# Altium PCB PCB1.PcbDoc
Units mil, origin at the board's own origin, x right, y up, seen from the top; angles counter-clockwise.
Board outline 1760 x 1045 mil, 4 copper layers (Top Copper, Signal Layer 1, Signal Layer 2, Bottom Copper), stack 38.189 mil thick; 34 components, 38 nets, 181 pads, 78 vias.
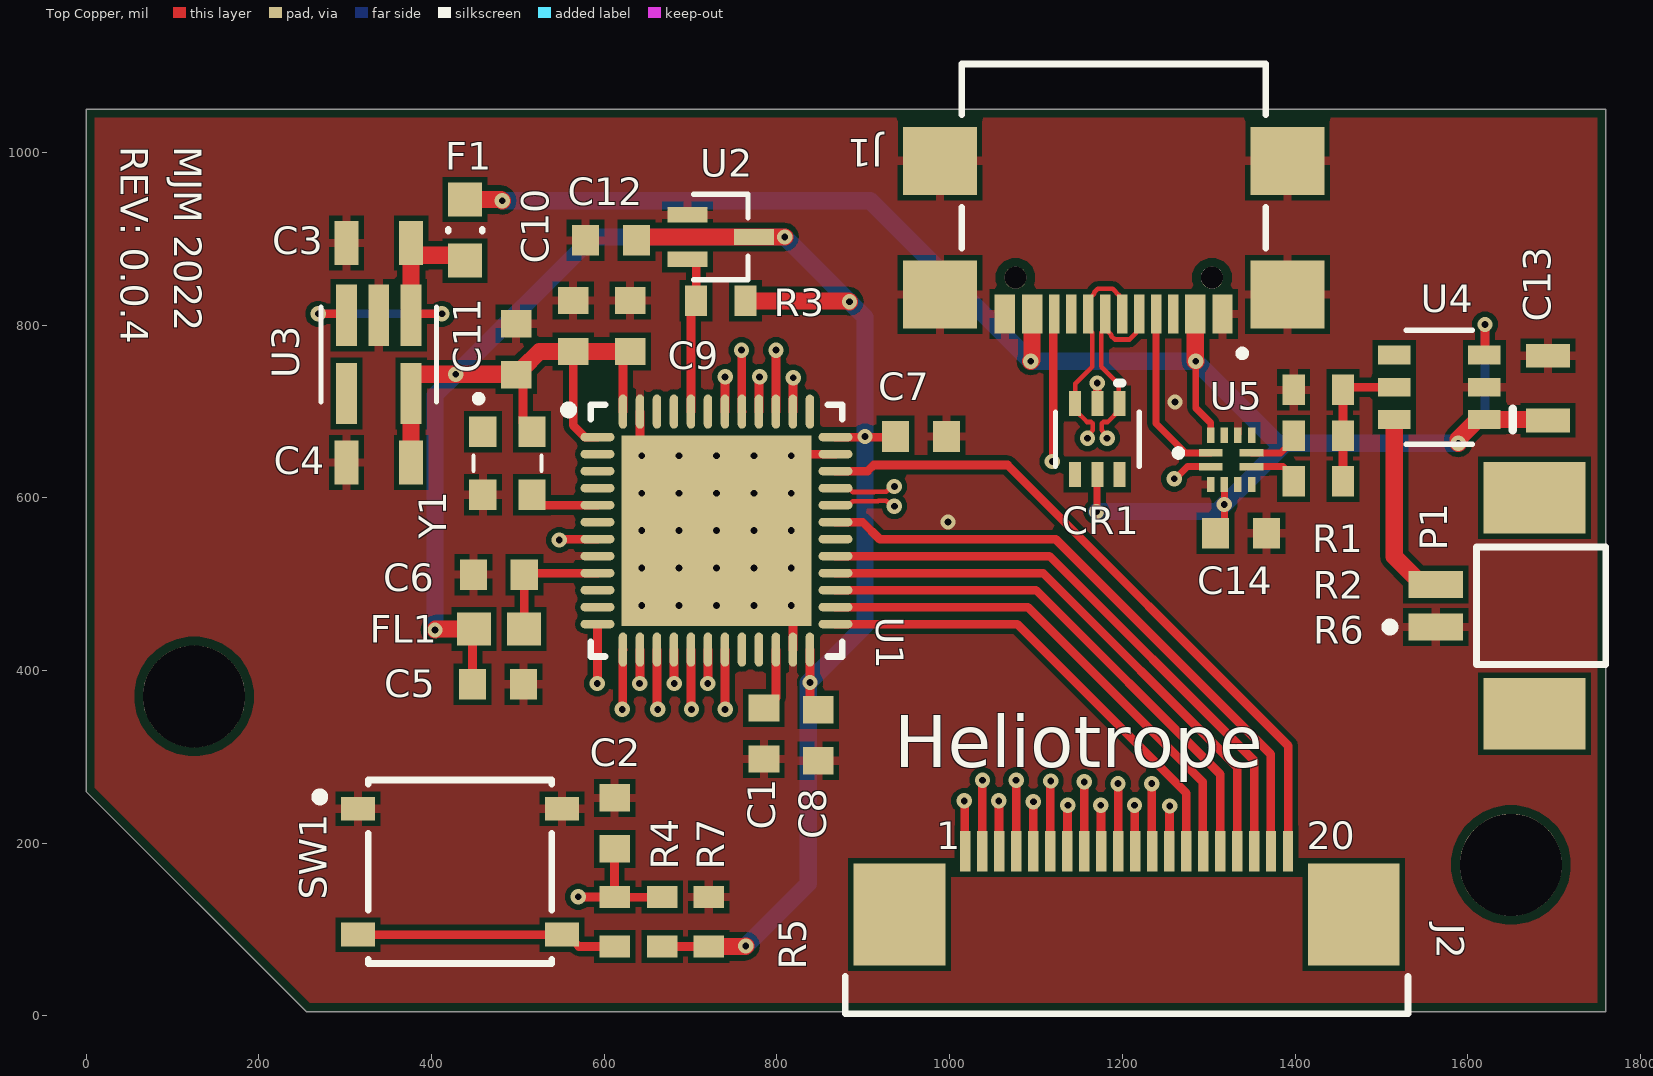
[diagram p0: Top Copper view]
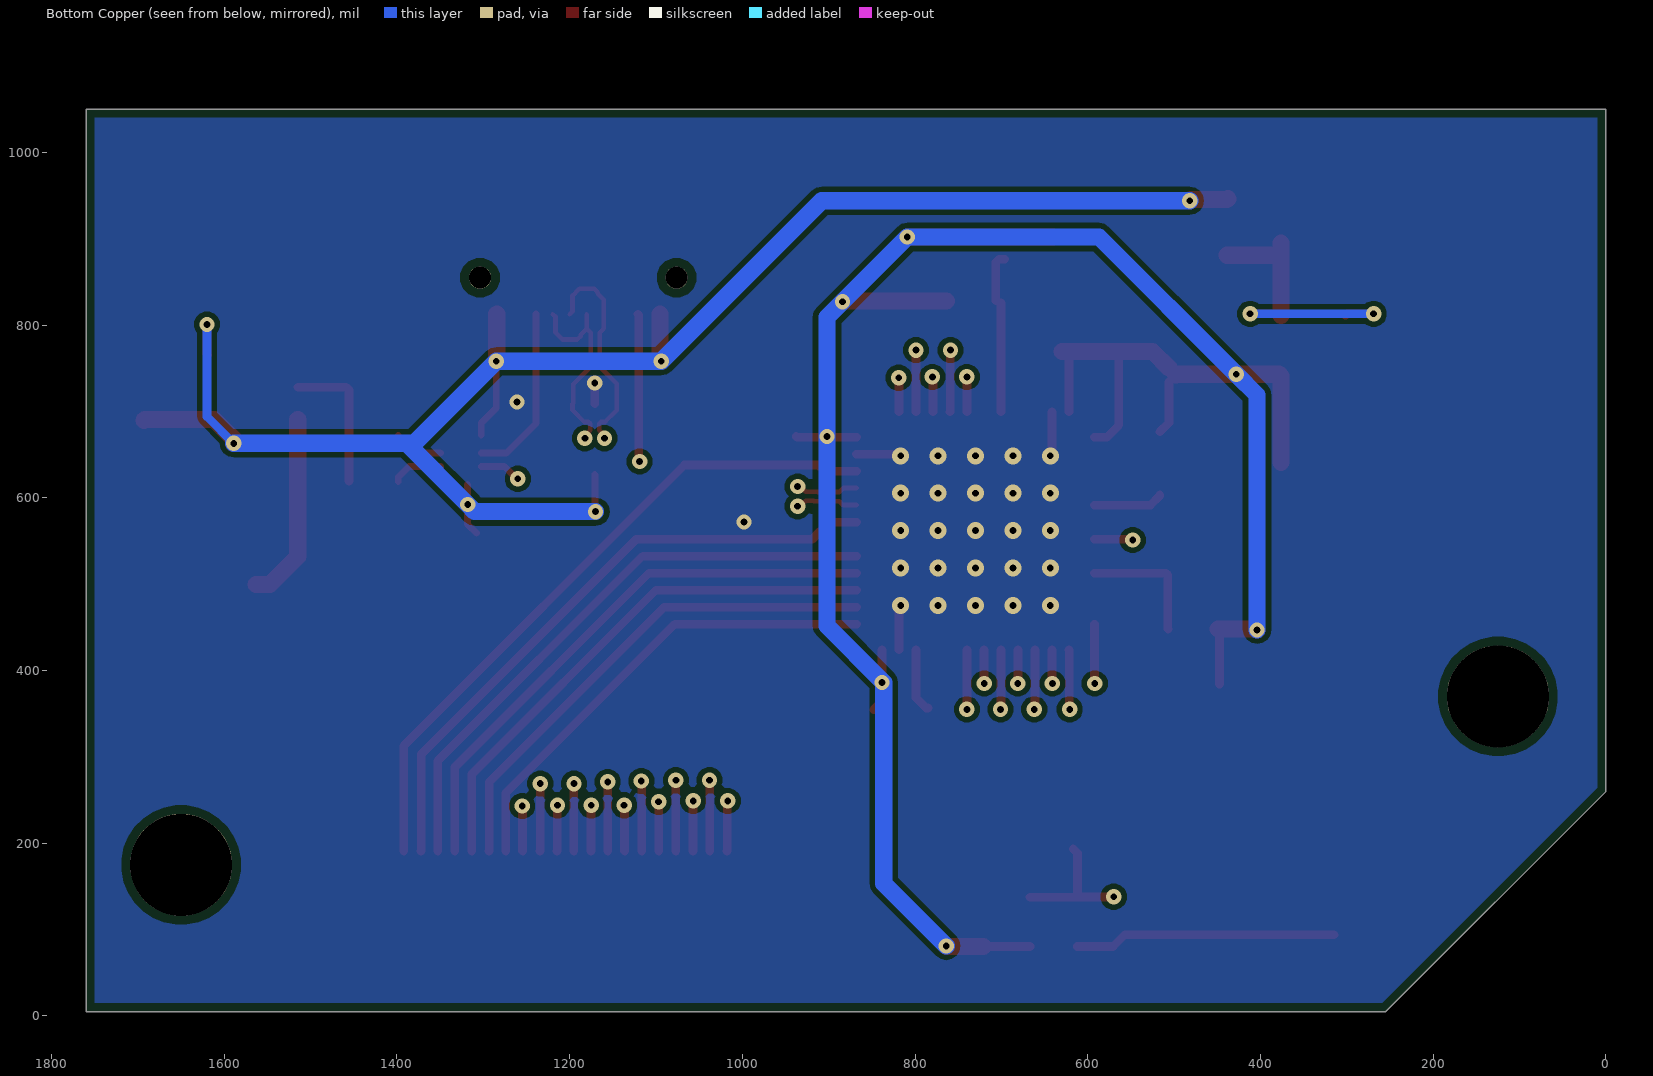
[diagram p1: Bottom Copper view, seen from below]
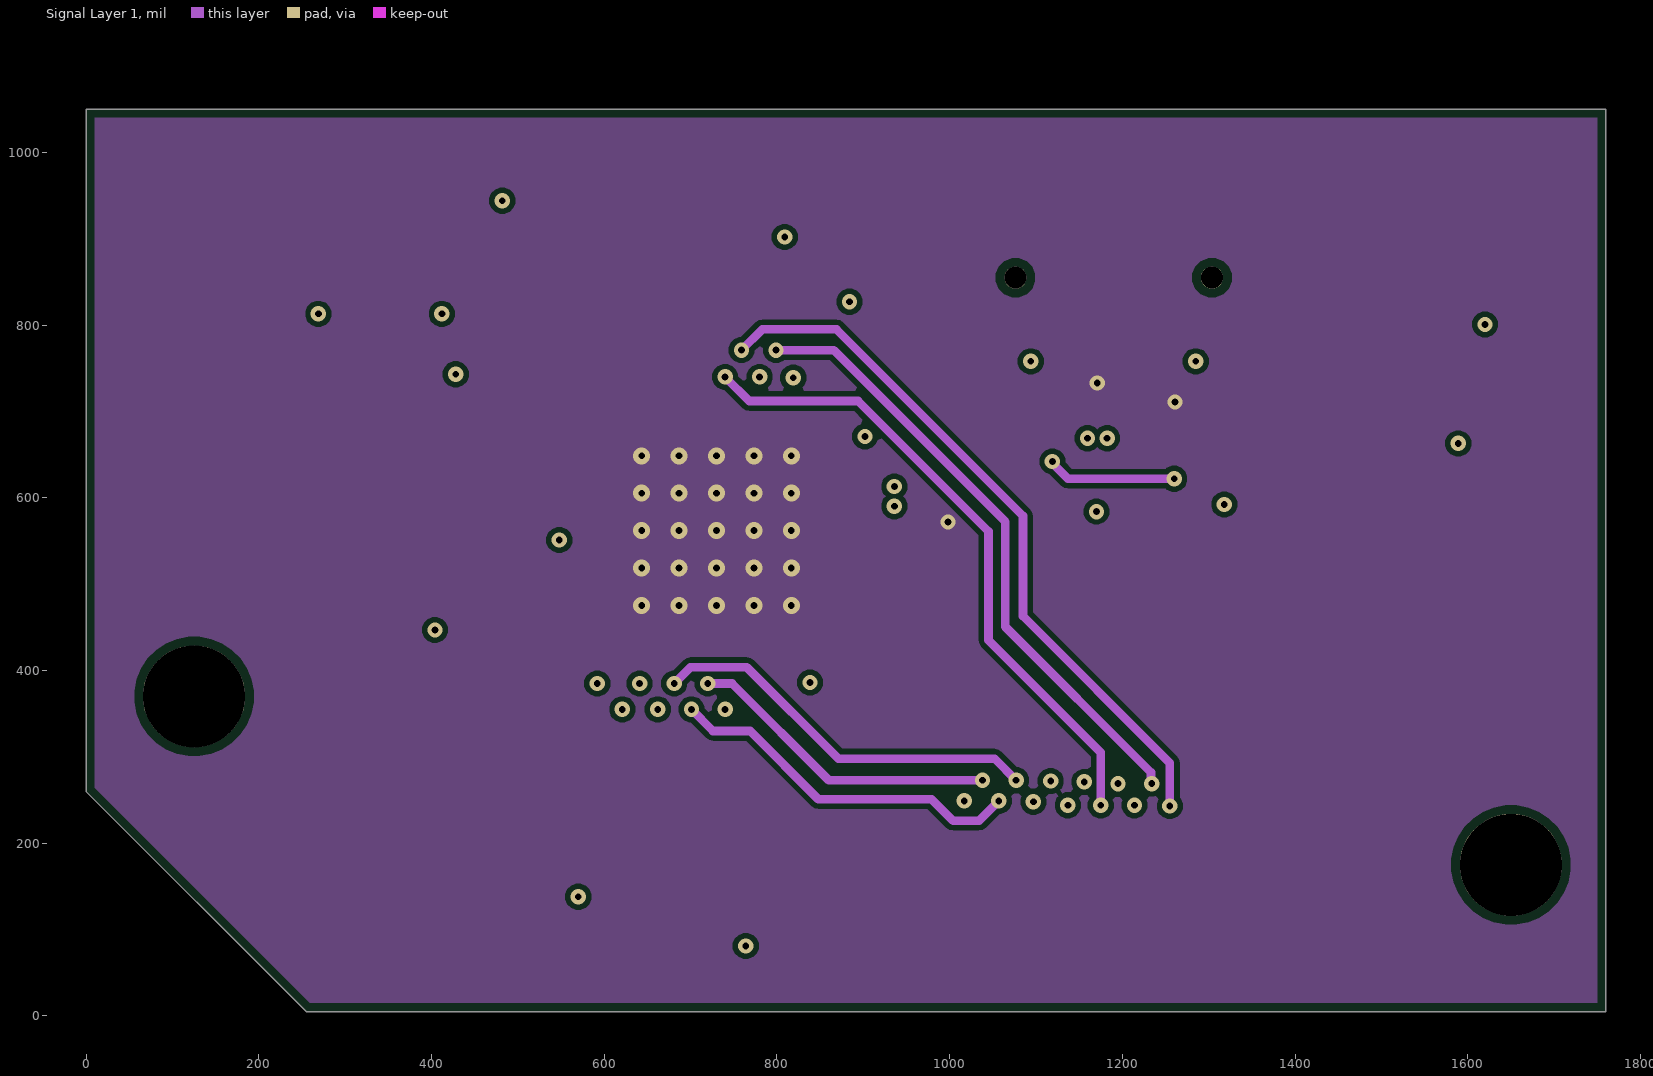
[diagram p2: Signal Layer 1]
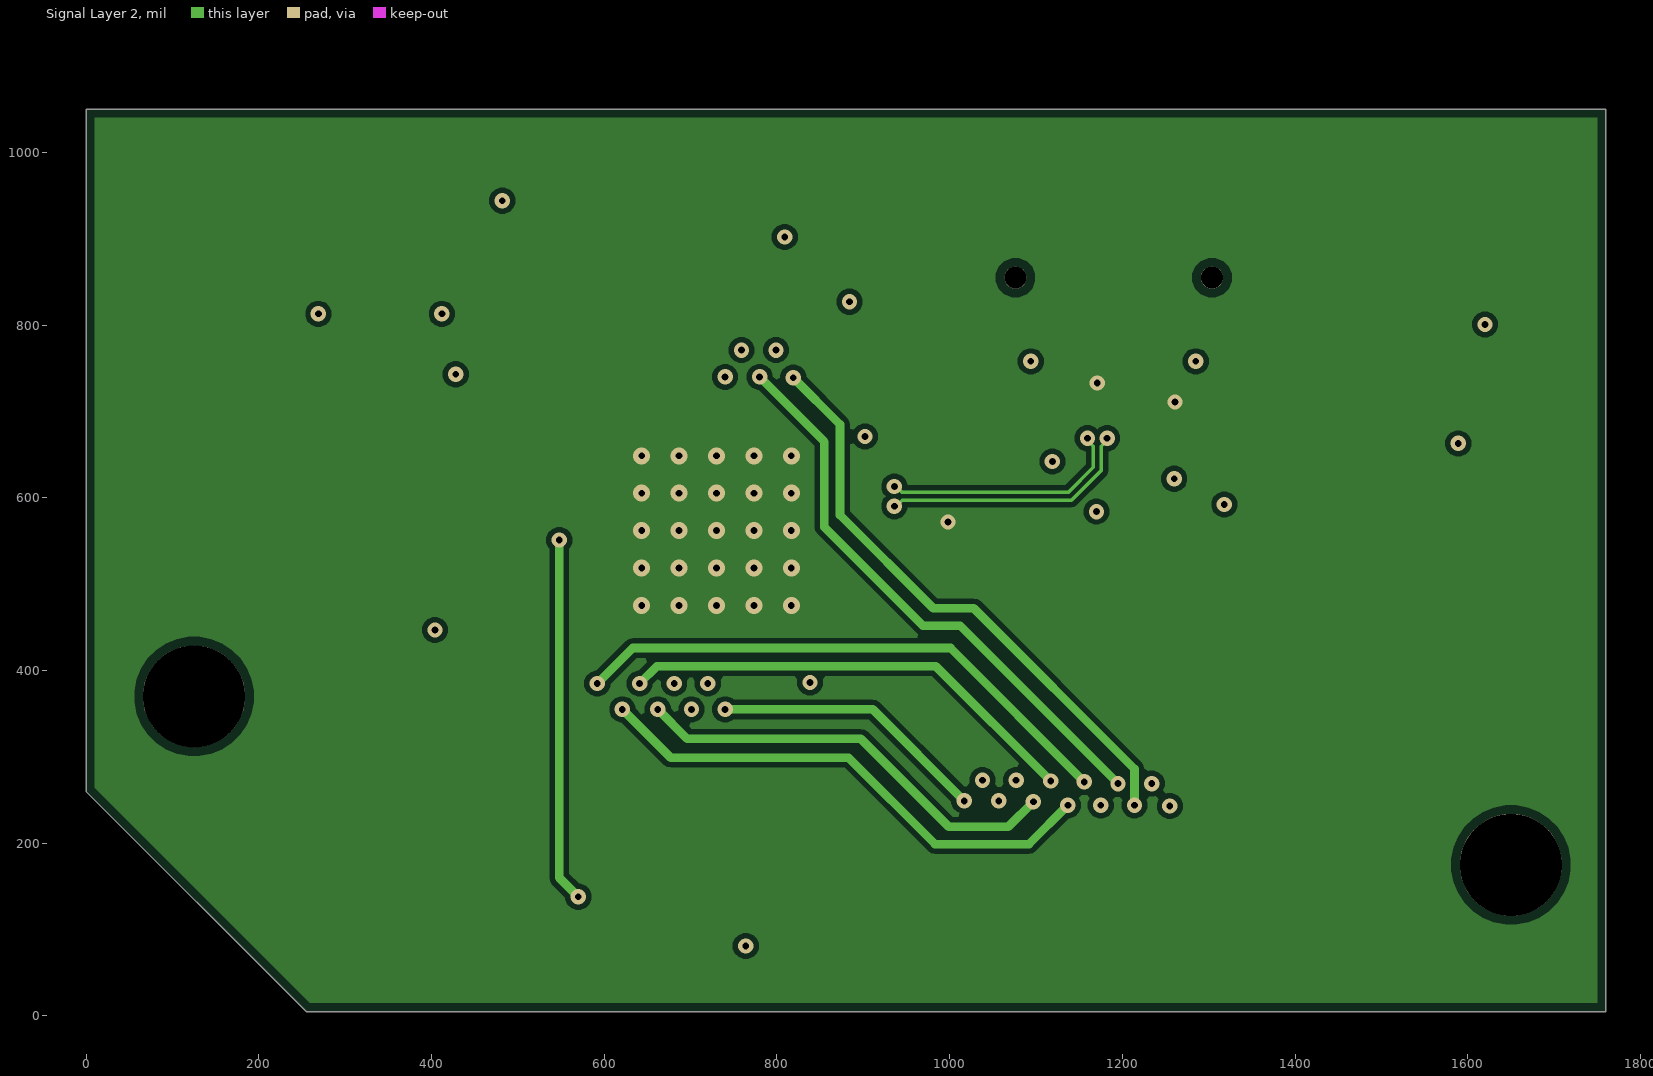
[diagram p3: Signal Layer 2]
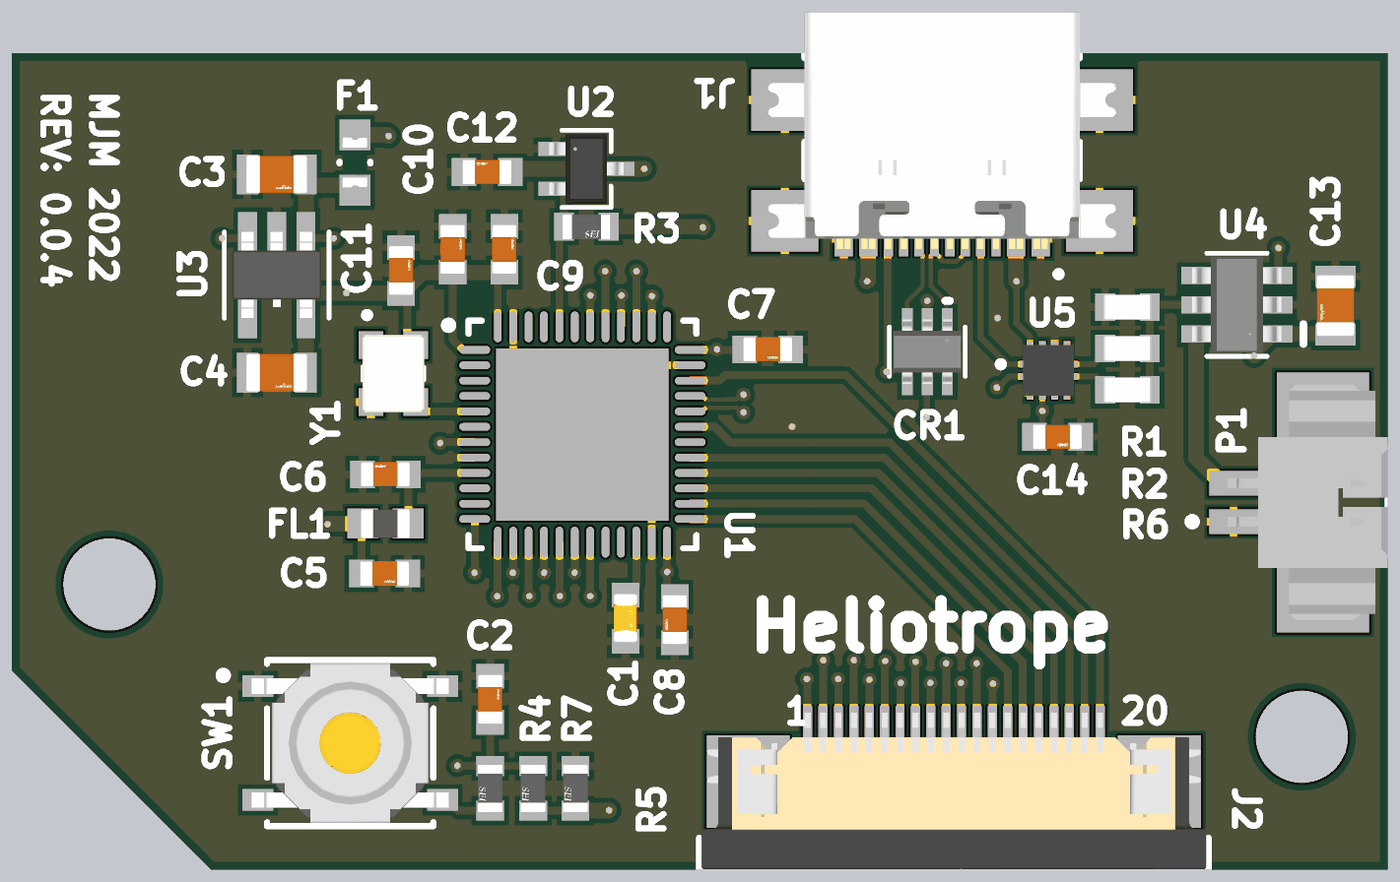
[diagram p4: 3D render of the assembled board from above, using the file's embedded part models]

## Layer stack, top to bottom
Top Mask: solder mask 0.5906, Solder Resist, Dk 3.8
Top Copper: signal copper 1.378
Dielectric 1: prepreg 3.937, 2313, Dk 4.05
Signal Layer 1: signal copper 0.689
Core: core 26.1811, FR-4, Dk 4.5
Signal Layer 2: signal copper 0.689
Dielectric 2: prepreg 3.937, 2313, Dk 4.05
Bottom Copper: signal copper 1.378
Bottom Mask: solder mask 0.5906, Solder Resist, Dk 3.8

## Board outline
0,260 0,1050 1760,1050 1760,5 255,5

## Design rules (kind name [scope] priority, off if disabled: settings)
BoardOutlineClearance [All] p1: gap=7.87 ignorepadtopadclearanceinfootprint=FALSE except(10: Poly-OutlineEdge)
Clearance [All] p1: gap=6 ignorepadtopadclearanceinfootprint=FALSE except(4: Arc-Arc Arc-Track Arc-SMDPad Arc-THPad Arc-Text Track-Track Track-SMDPad Track-THPad Track-Text SMDPad-SMDPad SMDPad-THPad SMDPad-Text THPad-THPad THPad-Text Fill-Text Poly-Text Region-Text Text-Text; 5: Arc-Via Track-Via SMDPad-Via THPad-Via Via-Via Via-Text; 9.84: Arc-Hole Track-Hole SMDPad-Hole THPad-Hole Via-Hole Fill-Hole Poly-Hole Region-Hole Text-Hole)
ComponentClearance [All] p1: gap=4 collisioncheckmode=3 verticalgap=4 showdistances=TRUE
DiffPairsRouting [All] p1: maxlimit=5 minlimit=5 mostfreqgap=5 toplayer_minwidth=5.46 toplayer_maxwidth=5.46 toplayer_prefwidth=5.46 midlayer1_minwidth=4.2 midlayer1_maxwidth=4.2 midlayer1_prefwidth=4.2 midlayer2_minwidth=4.2 midlayer2_maxwidth=4.2 midlayer2_prefwidth=4.2 bottomlayer_minwidth=5.46 bottomlayer_maxwidth=5.46 bottomlayer_prefwidth=5.46 impedanceprofiledriven=TRUE impedanceprofileid={086857F6-9E25-4997-8658-C5A159B1B94C} impedanceprofilevalue=90.000000 maxuncoupledlength=500
Height [All] p1: minheight=0 maxheight=71497.94 prefheight=500
HoleSize [All] p1: absolutevalues=TRUE maxlimit=248.03 minlimit=7.87 maxpercent=80.000 minpercent=20.000
HoleToHoleClearance [All] p1: gap=9.84 allowstackedmicrovias=FALSE
MatchedLengths MatchLengths_xSignals_U3_U2_2 [InxSignalClass('xSignals_U3_U2_MatchLengthsClass_2')] p1: tolerance=400 checknetsindiffpair=FALSE checkdiffpairvsdiffpair=TRUE checkxsignals=TRUE checkothers=TRUE
MatchedLengths MatchLengths_xSignals_U3_U2_1 [InxSignalClass('xSignals_U3_U2_MatchLengthsClass_1')] p2: tolerance=400 checknetsindiffpair=FALSE checkdiffpairvsdiffpair=TRUE checkxsignals=TRUE checkothers=TRUE
MatchedLengths MatchLengths_xSignals_U3_U2 [InxSignalClass('xSignals_U3_U2_MatchLengthsClass')] p3: tolerance=400 checknetsindiffpair=FALSE checkdiffpairvsdiffpair=TRUE checkxsignals=TRUE checkothers=TRUE
MatchedLengths MatchLengths_xSignals_U1_U2_2 [InxSignalClass('xSignals_U1_U2_MatchLengthsClass_2')] p4: tolerance=400 checknetsindiffpair=FALSE checkdiffpairvsdiffpair=TRUE checkxsignals=TRUE checkothers=TRUE
MatchedLengths MatchLengths_xSignals_U1_U2_1 [InxSignalClass('xSignals_U1_U2_MatchLengthsClass_1')] p5: tolerance=400 checknetsindiffpair=FALSE checkdiffpairvsdiffpair=TRUE checkxsignals=TRUE checkothers=TRUE
MatchedLengths MatchLengths_xSignals_U1_U2 [InxSignalClass('xSignals_U1_U2_MatchLengthsClass')] p6: tolerance=400 checknetsindiffpair=FALSE checkdiffpairvsdiffpair=TRUE checkxsignals=TRUE checkothers=TRUE
MinimumAnnularRing [All] p1: minimumring=3
MinimumSolderMaskSliver [All] p1: minsoldermaskwidth=0
PlaneClearance [All] p1: clearance=6
PlaneConnect PlaneConnectPowerPads [InPadClass('PowerPads')] p1: planeconnectstyle=Direct reliefexpansion=20 reliefentries=4 reliefconductorwidth=10 reliefairgap=10
PlaneConnect [All] p2: pad.planeconnectstyle=Relief pad.reliefexpansion=11.81 pad.reliefentries=4 pad.reliefconductorwidth=10 pad.reliefairgap=6 via.planeconnectstyle=Direct via.reliefexpansion=11.81 via.reliefentries=4 via.reliefconductorwidth=5 via.reliefairgap=5
PolygonConnect PolygonConnectPowerPads [All vs (InPadClass('PowerPads'))] p1: connectstyle=Direct reliefconductorwidth=10 reliefentries=4 polygonreliefangle="90 Angle" airgapwidth=10
PolygonConnect [All] p2: thpad.connectstyle=Relief thpad.reliefconductorwidth=10 thpad.reliefentries=4 thpad.polygonreliefangle="90 Angle" thpad.airgapwidth=6 smdpad.connectstyle=Relief smdpad.reliefconductorwidth=10 smdpad.reliefentries=4 smdpad.polygonreliefangle="90 Angle" smdpad.airgapwidth=6 via.connectstyle=Direct via.reliefconductorwidth=5 via.reliefentries=4 via.polygonreliefangle="90 Angle" via.airgapwidth=5
RoutingVias [All] p1: holewidth=7.87 width=17.72 viastyle="Through Hole" minholewidth=7.87 minwidth=17.72 maxholewidth=248.03 maxwidth=257.87
SilkToSilkClearance [All] p1: silktosilkclearance=0
SilkToSolderMaskClearance [IsPad] p1: minsilkscreentomaskgap=4 clearancetoexposedcopper=TRUE
SolderMaskExpansion Vias [IsVia] p1: expansion=2.95 istentingtop=TRUE
SolderMaskExpansion [All] p2: expansion=2.95 istentingtop=FALSE
Width Power [(InNet('1V2') OR InNet('2V5') OR InNet('3V3') OR InNet('5V') OR InNet('VPLL') OR InNet('USB_VBUS') OR InNet('1V2') OR InNet('A_3V3') OR InNet('LED_B') OR InNet('LED_R')OR InNet('LED_G') or InNet('NetJ2_1'))] p1: maxlimit=25 minlimit=5 preferedwidth=10 minimp=50.000000 maximp=50.000000 favimp=50.000000
Width [All] p2: maxlimit=50 minlimit=5.29 preferedwidth=6.49 toplayer_minwidth=6.49 midlayer1_prefwidth=5.29 midlayer2_prefwidth=5.29 bottomlayer_minwidth=6.49 minimp=50.000000 maximp=50.000000 favimp=50.000000
20 further rules are at their usual default settings.

## Classes and differential pairs
differential pair OTGFS: +OTGFS_P -OTGFS_N

## Components (designator, comment, footprint, x,y, rotation, side; value= is the part's Value field where it differs from the comment)
C1 "CC0603KRX7R6BB225" FP-CC0603-DA-MFG 785,327 r90 top value=2.2uF
C2 "CC0603JRX7R9BB104" FP-CC0603-DA-MFG 612,223 r270 top value=0.1uF
C3 "GRM21BR71A106KA73K" FP-GRM21B-0_15-MFG 339,895 r0 top value=10uF
C4 "GRM21BR71A106KA73K" FP-GRM21B-0_15-MFG 339,641 r0 top value=10uF
C5 "CC0603JRX7R9BB104" FP-CC0603-DA-MFG 477,384 r180 top value=0.1uF
C6 "CC0603JRX7R9BB104" FP-CC0603-DA-MFG 478,511 r0 top value=0.1uF
C7 "CC0603JRX7R9BB104" FP-CC0603-DA-MFG 967,671 r180 top value=0.1uF
C8 "CC0603JRX7R9BB104" FP-CC0603-DA-MFG 848,325 r90 top value=0.1uF
C9 "CC0603JRX7R9BB104" FP-CC0603-DA-MFG 630,799 r270 top value=0.1uF
C10 "CC0603JRX7R9BB104" FP-CC0603-DA-MFG 564,799 r270 top value=0.1uF
C11 "CC0603JRX7R9BB104" FP-CC0603-DA-MFG 498,772 r270 top value=0.1uF
C12 "CC0603JRX7R9BB104" FP-CC0603-DA-MFG 608,898 r0 top value=0.1uF
C13 "GRM21BR71A106KA73K" FP-GRM21B-0_15-MFG 1693,727 r270 top value=10uF
C14 "CC0603JRX7R9BB104" FP-CC0603-DA-MFG 1337.53,559 r180 top value=0.1uF
CR1 "RCLAMP0504FBTCT" SC70_RCLAMP_SEM 1171,668 r270 top
F1 "0603L010YR" FP-0603L-MFG 439,910 r90 top
FL1 "BLM18AG601SN1D" BEADC1608X95N 478,448 r0 top value="600 Ohm"
J1 "USB4110-GF-A" GCT_USB4110-GF-A_REVB 1190,855 r180 top
J2 "68712014522" 68712014522 1205,90 r0 top
P1 "53261-0271" MOLX-53261-0271_V 1620,475 r90 top
R1 "RMCF0603FT62K0" FP-RMCF0603-MFG 1427,725 r0 top value=62k
R2 "RMCF0603FT33K0" FP-RMCF0603-MFG 1427,619 r0 top value=33k
R3 "RMCF0603JT100K" FP-RMCF0603-MFG 735,828 r0 top value=100K
R4 "RMCF0603JT10K0" FP-RMCF0603-MFG 667,109 r270 top value=10K
R5 "RMCF0603JT1K00" FP-RMCF0603-MFG 612,109 r270 top value=1K
R6 "RMCF0603FT102K" FP-RMCF0603-MFG 1427,672 r0 top value=102k
R7 "RMCF0603JT10K0" FP-RMCF0603-MFG 721,109 r270 top value=10K
SW1 "PTS526SK15SMTR2LFS" FP-PTS526SK15SMTR2LFS-MFG 433,167 r0 top
U1 "STM32F411CEU6" STM-UFQFPN48_M 730,562 r0 top
U2 "MIC803-26D4VC3-TR" SC-70_C3_MCH 735,902 r270 top
U3 "TLV74033PDBVR" DBV0005A-IPC_A 339,766 r270 top
U4 "AP22653AW6-7" SOT26-A1_DIO 1567,728 r180 top
U5 "PTN5150AHXMP" IC_PTN5150AHXMP 1326,644 r0 top
Y1 "ECS-2520MV-080-CN-TR" OSC_ECS-2520S25-250-FN-TR 488,640 r270 top

## Footprints (in the part's own frame and the unit in brackets; to place one, negate y for a bottom-side part, rotate by r counter-clockwise, add the part's x,y. Pads: shape width x height; smd on the part's side, far side on the other; paste and mask are expansions set on the pad)
68712014522 [mm] "ZIF Connectors, Horizontal, Bottom Contact, pitch 0.5mm, 20p"
  rect 0.3x1.2 smd: 1(-4.75,2.56) 2(-4.25,2.56) 3(-3.75,2.56) 4(-3.25,2.56) 5(-2.75,2.56) 6(-2.25,2.56) 7(-1.75,2.56) 8(-1.25,2.56) 9(-0.75,2.56) 10(-0.25,2.56) 11(0.25,2.56) 12(0.75,2.56) 13(1.25,2.56) 14(1.75,2.56) 15(2.25,2.56) 16(2.75,2.56) 17(3.25,2.56) 18(3.75,2.56) 19(4.25,2.56) 20(4.75,2.56)
  rect 2.7x3 smd: MP1(-6.68,0.7) MP2(6.68,0.7)
  silkscreen extent -8.27,-2.22 8.28,-1.12, body extent -8.2,-2.15 8.2,2.95, height 2.1
BEADC1608X95N [mm]
  rect 1x0.97 smd: 1(-0.735,0) 2(0.735,0)
  body extent -0.8,-0.48 0.8,0.47, height 0.78
DBV0005A-IPC_A [mm]
  rect 1.805x0.612 smd paste+0 mask+0: 1(-1.15,0.95) 2(-1.15,0) 3(-1.15,-0.95) 4(1.15,-0.95) 5(1.15,0.95)
  silkscreen extent -1.4,-1.7 1.4,1.7, body extent -1.4,-1.45 1.4,1.45, height 1.2
FP-0603L-MFG [mm]
  rect 1x1 smd paste+0 mask+0: 1(-0.9,0) 2(0.9,0)
  silkscreen extent -0.03,-0.5 0.03,0.5, body extent -1.5,-0.6 1.5,0.6, height 0.25
FP-CC0603-DA-MFG [mm]
  rect 0.8x0.9 smd paste+0 mask+0: 1(-0.75,0) 2(0.75,0)
  body extent -1.35,-0.75 1.35,0.75, height 0.25
FP-GRM21B-0_15-MFG [mm]
  rect 0.7x1.3 smd paste+0 mask+0: 1(-0.95,0) 2(0.95,0)
  body extent -1.4,-0.8 1.4,0.8, height 0.25
FP-PTS526SK15SMTR2LFS-MFG [mm]
  rect 1x0.7 smd paste+0 mask+0: 1(-3,1.85) 2(3,1.85) 3(-3,-1.85) 4(3,-1.85)
  silkscreen extent -4.25,-2.7 2.7,2.7, body extent -3.6,-2.8 3.6,2.8, height 0.25
FP-RMCF0603-MFG [mm]
  rect 0.65x0.9 smd paste+0 mask+0: 1(-0.725,0) 2(0.725,0)
  body extent -1.15,-0.58 1.15,0.58, height 0.25
GCT_USB4110-GF-A_REVB [mm]
  rect 0.6x1.15 smd: A1/B12(-3.2,1.075) A4/B9(-2.4,1.075) B1/A12(3.2,1.075) B4/A9(2.4,1.075)
  rect 0.3x1.15 smd: A5(-1.25,1.075) A6(-0.25,1.075) A7(0.25,1.075) A8(1.25,1.075) B5(1.75,1.075) B6(0.75,1.075) B7(-0.75,1.075) B8(-1.75,1.075)
  rect 2.18x2 smd: S1(-5.11,0.5) S2(5.11,0.5) S3(-5.11,-3.43) S4(5.11,-3.43)
  round 0.65 hole 0.65 unplated: ""(-2.89,0) ""(2.89,0)
  silkscreen extent -4.47,-6.28 4.47,2.33, body extent -5.65,-6.28 5.65,1.42, height 3.26
IC_PTN5150AHXMP [mm]
  rect 0.7x0.22 smd paste-0.01 mask+0.05: 1(-0.6,0.2) 2(-0.6,-0.2) 7(0.6,-0.2) 8(0.6,0.2)
  rect 0.22x0.45 smd paste-0.01 mask+0.05: 3(-0.6,-0.725) 4(-0.2,-0.725) 5(0.2,-0.725) 6(0.6,-0.725) 9(0.6,0.725) 10(0.2,0.725) 11(-0.2,0.725) 12(-0.6,0.725)
  silkscreen extent -1.65,0.1 -1.45,0.3, body extent -0.83,-0.83 0.83,0.83, height 0.4
MOLX-53261-0271_V [mm] "Header, 2-Leads, Pitch 1.25mm"
  rect 0.8x1.6 smd: 1(-0.625,1.45) 2(0.625,1.45)
  rect 2.1x3 smd: MP1(-3.175,-1.45) MP2(3.175,-1.45)
  silkscreen extent -1.72,-3.55 1.73,2.92, body extent -3.82,-3.55 3.83,1.65, height 3.41
OSC_ECS-2520S25-250-FN-TR [mm]
  rect 0.9x0.8 smd: 1(-0.925,-0.725) 2(0.925,-0.725) 3(0.925,0.725) 4(-0.925,0.725)
  silkscreen extent -2,-1 0.22,1, body extent -1.25,-1 1.25,1, height 0.6
SC70_RCLAMP_SEM [mil]
  rect 29x14 smd paste+0 mask+0: 1(-41,25.59) 2(-41,0) 3(-41,-25.59) 4(41,-25.59) 5(41,0) 6(41,25.59)
  silkscreen extent -65,-49 32,49, body extent -41,-44 41,44, height 43
SC-70_C3_MCH [mil]
  rect 18x46 smd paste+0 mask+0: 1(-25.59,-38.5) 2(25.59,-38.5) 3(0,38.5)
  silkscreen extent -50,-32 50,32, body extent -44,-48 44,48, height 43
SOT26-A1_DIO [mil]
  rect 37.5x22 smd paste+0 mask+0: 1(-52.25,37.4) 2(-52.25,0) 3(-52.25,-37.4) 4(52.25,-37.4) 5(52.25,0) 6(52.25,37.4)
  silkscreen extent -85,-66 39,66, body extent -57,-61 57,61, height 57
STM-UFQFPN48_M [mm] "QFN, 48-Leads, Body 7.1x7.1mm, Pitch 0.5mm, Thermal Pad 5.6x5.6mm, IPC Low Density"
  oval 1x0.25 smd: 1(-3.5,2.75) 2(-3.5,2.25) 3(-3.5,1.75) 4(-3.5,1.25) 5(-3.5,0.75) 6(-3.5,0.25) 7(-3.5,-0.25) 8(-3.5,-0.75) 9(-3.5,-1.25) 10(-3.5,-1.75) 11(-3.5,-2.25) 12(-3.5,-2.75) 25(3.5,-2.75) 26(3.5,-2.25) 27(3.5,-1.75) 28(3.5,-1.25) 29(3.5,-0.75) 30(3.5,-0.25) 31(3.5,0.25) 32(3.5,0.75) 33(3.5,1.25) 34(3.5,1.75) 35(3.5,2.25) 36(3.5,2.75)
  oval 0.25x1 smd: 13(-2.75,-3.5) 14(-2.25,-3.5) 15(-1.75,-3.5) 16(-1.25,-3.5) 17(-0.75,-3.5) 18(-0.25,-3.5) 19(0.25,-3.5) 20(0.75,-3.5) 21(1.25,-3.5) 22(1.75,-3.5) 23(2.25,-3.5) 24(2.75,-3.5) 37(2.75,3.5) 38(2.25,3.5) 39(1.75,3.5) 40(1.25,3.5) 41(0.75,3.5) 42(0.25,3.5) 43(-0.25,3.5) 44(-0.75,3.5) 45(-1.25,3.5) 46(-1.75,3.5) 47(-2.25,3.5) 48(-2.75,3.5)
  rect 5.6x5.6 smd: 49(0,0)
  silkscreen extent -4.47,-3.7 3.7,3.7, body extent -3.55,-3.55 3.55,3.55, height 0.6

## Part data
C1: library part CMP-004-000012-5, "Cap Ceramic 2.2uF 10V X7R 10% SMD 0603 125C Paper T/R", Type=0603
C2 C5 C6 C7 C8 C9 C10 C11 C12 C14: library part CMP-004-000009-6, "0603 0.1 uF 50 V ±5 % Tolerance X7R SMT Multilayer Ceramic Capacitor", Type=0603
C3 C4 C13: library part CMP-004-000013-3, "Cap Ceramic 10uF 10V X7R 10% Pad SMD 0805 125C T/R", Type=0805
CR1: library part CMP-138-000000-2, "ESD Suppressor TVS Quad Uni-Dir 30kV 6-Pin SC-70 T/R", Mfr_Name=Semtech, Component Type=Standard, Copyright="Copyright (C) 2022 Ultra Librarian. All rights reserved.", Design Item ID=RCLAMP0504FBTCT, Digi-Key_Part_Number_1=RCLAMP0504FBTCTTR-ND, Digi-Key_Part_Number_2=RCLAMP0504FBTCTCT-ND, Digi-Key_Part_Number_3=RCLAMP0504FBTCTDKR-ND, Manufacturer_Part_Number=RCLAMP0504FBTCT, Pin Count=6, RefDes=RefDes, Source=RCLAMP0504FBTCT.SchLib, Type=DEV
F1: library part CMP-096-000003-1, "15VDC 100mA"
FL1: library part CMP-032-000000-2, "600 Ohms @ 100MHz 1 Ferrite Bead 0603 _1608 Metric_ 500mA 380mOhm", Manufacturer=Murata, Package=0608, Component Type=Standard, Design Item ID=BLM18AG601SN1D, Digi-Key_Part_Number=490-1014-1-ND, Manufacturer Product Number=BLM18AG601SN1D, Pin Count=2, Source=SnapEDAsch.SchLib
J1: library part CMP-130-000000-9, "Conn USB Type C RCP 16 POS 0.3mm/0.5mm Solder ST SMD 16 Terminal 1 Port T/R", Package=None, Availability=Unavailable, Component Type=Standard, Design Item ID=USB4110-GF-A, MP=USB4110-GF-A, Pin Count=16, Price=None, Source=USB4110-GF-A_REVB.SchLib
J2: library part CMP-00003-2, "Ffc / Fpc Board Connector, Zif, Surface Mount, Plug, 20, Bottom, 0.5 Mm Rohs Compliant: Yes", Package=None, Availability="In Stock", Check_prices=https://www.snapeda.com/parts/68712014522/Wurth+Electronics+Inc./view-part/?ref=eda, Component Type=Standard, Design Item ID=68712014522, MF="Wurth Electronics", MP=68712014522, Pin Count=20, Price=None, Purchase-URL=https://pricing.snapeda.com/search/part/68712014522/?ref=eda, SnapEDA_Link=https://www.snapeda.com/parts/68712014522/Wurth+Electronics+Inc./view-part/?ref=snap, Source=68712014522.SchLib
P1: library part CMP-042-000002-1, "1.25mm Pitch PicoBlade™ Header, Surface Mount, Right Angle, Lead-Free, 2 Circuits"
R1: library part CMP-012-000002-2, "Res Thick Film 0603 62K Ohm 1% 1/10W ±100ppm/°C Molded SMD SMD Paper T/R", Type=0603
R2: library part CMP-012-000005-1, "Res Thick Film 0603 33K Ohm 1% 0.1W(1/10W) ±100ppm/C Pad SMD Automotive T/R", Type=0603
R3: library part CMP-000004-8, "Res Thick Film 0603 100K Ohm 5% 1/10W ±200ppm/°C Molded SMD Paper T/R", Type=0603
R4 R7: library part CMP-012-000009-4, "Res Thick Film 0603 10K Ohm 5% 1/10W ±100ppm/°C Molded SMD SMD Paper T/R", Type=0603
R5: library part CMP-000007-3, "Res Thick Film 0603 1K Ohm 5% 1/10W ±200ppm/°C Molded SMD Paper T/R", Type=0603
R6: library part CMP-012-000004-1, "Res Thick Film 0603 102K Ohm 1% 1/10W ±100ppm/°C Molded SMD SMD Paper T/R", Type=0603
SW1: library part CMP-014-000000-1, "Switch Tactile N.O. SPST Round Button Gull Wing 0.05A 12VDC 200000Cycles 2.55N SMD T/R"
U1: library part CMP-000017-1, "ARM® Cortex®-M4 STM32 F4 Microcontroller IC 32-Bit 100MHz 512KB (512K x 8) FLASH 48-UFQFPN (7x7)"
U2: library part CMP-136-000000-2, "3-Pin Microprocessor Supervisor Circuit w/ Open-Drain Reset Output", Mfr_Name=Microchip, Component Type=Standard, Copyright="Copyright (C) 2022 Ultra Librarian. All rights reserved.", Design Item ID=MIC803-26D4VC3-TR, Digi-Key_Part_Number_1=1611-MIC803-26D4VC3-CT-ND, Digi-Key_Part_Number_2=576-3799-1-ND, Digi-Key_Part_Number_3=576-3799-2-ND, Digi-Key_Part_Number_4=576-3799-6-ND, Manufacturer_Part_Number=MIC803-26D4VC3-TR, Pin Count=3, RefDes=RefDes, Source=MIC803-26D4VC3-TR.SchLib, Type="Simple Reset/Power-On Reset"
U3: library part CMP-140-000000-6, "300-mA low-dropout (LDO) regulator with foldback current limit 5-SOT-23 -40 to 125", Mfr_Name="Texas Instruments", Component Type=Standard, Copyright="Copyright (C) 2022 Ultra Librarian. All rights reserved.", Design Item ID=TLV74033PDBVR, Digi-Key_Part_Number_1=296-TLV74033PDBVRTR-ND, Digi-Key_Part_Number_2=296-TLV74033PDBVRCT-ND, Digi-Key_Part_Number_3=296-TLV74033PDBVRDKR-ND, Manufacturer_Part_Number=TLV74033PDBVR, Pin Count=5, RefDes=RefDes, Source=TLV74033PDBVR.SchLib, Type=DEV
U4: library part CMP-148-000002-2, "PRECISION ADJUSTABLE CURRENT-LIMITED POWER SWITCHES, -40 to 85°C pF, RoHS", Mfr_Name="Diodes Inc", Component Type=Standard, Copyright="Copyright (C) 2022 Ultra Librarian. All rights reserved.", Design Item ID=AP22653AW6-7, Manufacturer_Part_Number=AP22653AW6-7, Pin Count=6, RefDes=RefDes, Source=AP22652AW6-7.SchLib, Type=DEV
U5: library part CMP-150-000000-2, "PTN5150A Series 2.7 to 5.5 V CC Logic for USB Type-C Applications - XFQFN-12", Package="XFQFN-12 NXP Semiconductors", Check_prices=https://www.snapeda.com/parts/PTN5150AHXMP/NXP+USA+Inc./view-part/?ref=eda, Component Type=Standard, Design Item ID=PTN5150AHXMP, Digi-Key_Part_Number=568-13083-2-ND, MF="NXP USA", MP=PTN5150AHXMP, Pin Count=12, Purchase-URL=https://pricing.snapeda.com/search/part/PTN5150AHXMP/?ref=eda, SnapEDA_Link=https://www.snapeda.com/parts/PTN5150AHXMP/NXP+USA+Inc./view-part/?ref=snap, Source=PTN5150AHXMP.SchLib
Y1: library part CMP-142-000000-4, "ECS-2520MV Series 8MHz 2.5x2mm 3.6 V SMT HCMOS Multivolt Crystal Oscillator", Package="SMD-4 ECS International", Component Type=Standard, Design Item ID=ECS-2520MV-080-CN-TR, Digi-Key_Part_Number=XC3029CT-ND, MF="ECS Inc.", MP=ECS-2520MV-080-CN-TR, Pin Count=4, Source=ECS-2520MV-080-CN-TR.SchLib

## Free pads (board coordinates)
  round 118.11 hole 118.11 unplated: MOUNTING(125,370) MOUNTING(1650,175)

## Via types
v1: diameter 17.72, hole 7.87, Top Copper to Bottom Copper, tented both sides, 53 vias
v2: diameter 19.68, hole 7.87, Top Copper to Bottom Copper, tented both sides, 25 vias

## Nets (pads, with @x,y where several pads share a name; then routed paths per layer and width w, separated by ;. In a path a pad name is that pad's centre, name@x,y a point inside that pad or via, vN(x,y) a via of type N, cw(c..) or ccw(c..) an arc to the next point about the centre after c; other vN are vias at no path point)
3.3V: C4.2 C5.2 C7.2 C8.2 C9.2 C10.2 C11.2 C12.2 FL1.1 R3.2 R4.2 R7.2 U1.1 U1.24 U1.36 U1.48 U2.3 U3.5 Y1.4 | length 2934
  Top Copper w10: C5.2 447.47,446.41 FL1.1 ; C11.2 506,734.47 506,686.96 Y1.4 ; C10.2 564,683.87 577.6,670.27 U1.1 ; U1.48 621.73,761.2 C9.2 ; C12.2 C12.2@640.53,901 ; R4.2 R7.2 ; U1.24 v1(838.27,386.14) 838.27,364.26 C8.2 ; U1.36 936.74,670.27 C7.2
  Top Copper w20: C4.2 U3.5 376.4,740.95 378.45,743 v1(428,743) 497.47,743 C11.2 ; v1(404,447) 405,448 FL1.1 ; C11.2@505.72,750.19 525,769.47 C10.2 C9.2 ; C12.2@640.53,902 U2.3 v1(809,902) ; R7.2 763.46,80.46 v1(764,81) ; R3.2 883,828 v1(884,827)
  Bottom Copper w20: v1(404,447) 404,719 v1(428,743) 587,902 v1(809,902) 902,809 902,451.73 v1@837.34,387.07 ; v1(764,81) 836.41,153.41 v1@836.41,386.14
  other v1: 902,671
5V: P1.2 U4.6 | length 220.2
  Top Copper w20: U4.6 1514.75,532.02 1547.17,499.61 P1.2
BOOT0: R3.1 U1.44 U2.2 | length 182.2
  Top Copper w10: U2.2 702.46,876.41 706.46,872.41 R3.1 ; U1.44 R3.1@700.47,825.98
CC1: J1.A5 U5.1 | length 204.1
  Top Copper w8: J1.A5 1239.21,685.79 1273,652 1302.25,652 U5.1
CC2: J1.B5 U5.2 | length 370.2
  Top Copper w8: v1(1260,622) 1261.25,622 1275.37,636.13 U5.2
  Top Copper w10: v1(1119,642) 1120.2,643.2 1120.2,811.77 J1.B5
  Signal Layer 1 w10: v1(1119,642) 1119,640 1137,622 v1(1260,622)
COL0: J2.12 U1.39 | length 871
  Top Copper w10: U1.39 U1.39 798.95,770.95 v1(799,771) ; v1(1234,269) 1234.26,268.74 1234.26,191.05 J2.12
  Signal Layer 1 w10: v1(799,771) 865.84,771 1064.42,572.42 1064.42,450.58 1233.13,281.87 1233.13,269.87 v1(1234,269)
COL1: J2.11 U1.38 | length 779.1
  Top Copper w10: U1.38 818.66,699.87 818.66,738.66 v1(819,739) ; v1(1214.02,244) 1214.43,243.59 1214.43,191.2 J2.11
  Signal Layer 2 w10: v1(819,739) 873,685 873,580 981,472 1028,472 1214.02,285.98 v1(1214.02,244)
COL2: J2.10 U1.40 | length 786.9
  Top Copper w10: U1.40 779.29,699.87 779.29,739.29 v1(780,740) ; v1(1195,269) 1195.08,268.92 1195.08,190.87 J2.10
  Signal Layer 2 w10: v1(780,740) 855,665 855,566 969,452 1012,452 v1(1195,269)
COL3: J2.9 U1.42 | length 843.7
  Top Copper w10: U1.42 739.92,699.87 739.92,739.92 v1(740,740) ; v1(1175,244) 1175.24,243.76 1175.24,191.02 J2.9
  Signal Layer 1 w10: v1(740,740) 768,712 894,712 1045,561 1045,435 1175,305 v1(1175,244)
COL4: J2.8 U1.12 | length 794.3
  Top Copper w10: v1(592,385) 592.2,385.2 U1.12 ; J2.8 1155.79,270.79 v1(1156,271)
  Signal Layer 2 w10: v1(592,385) 633,426 1001,426 v1(1156,271)
COL5: J2.7 U1.13 | length 722.2
  Top Copper w10: v1(621,355) 621.65,355.65 621.65,424.13 U1.13 ; J2.7 1136.52,191.2 1136.52,243.59 v1(1136.93,244)
  Signal Layer 2 w10: v1(621,355) 677,299 883,299 983,199 1091.93,199 v1(1136.93,244)
COL6: J2.13 U1.41 | length 955.8
  Top Copper w10: v1(759,771) 759.45,770.55 759.45,699.87 U1.41 ; J2.13 1254.61,191.18 1254.61,242.61 v1(1255,243)
  Signal Layer 1 w10: v1(759,771) 783,795 869,795 1085,579 1085,463 1255,293 v1(1255,243)
COL7: J2.14 U1.25 | length 554.5
  Top Copper w10: U1.25 1078.27,453.73 1274,258.01 1274,190.89 J2.14
COL8: J2.15 U1.26 | length 589.5
  Top Copper w10: U1.26 1090.58,473.42 1293,271 1293,191.37 J2.15
COL9: J2.16 U1.27 | length 622.8
  Top Copper w10: U1.27 1099.9,493.1 1313.27,279.73 J2.16
COL10: J2.17 U1.28 | length 655.5
  Top Copper w10: U1.28 1108.21,512.79 1332.95,288.05 J2.17
COL11: J2.18 U1.29 | length 687.6
  Top Copper w10: U1.29 1115.53,532.47 1352.64,295.36 J2.18
COL12: J2.19 U1.31 | length 727.9
  Top Copper w10: U1.31 899.16,571.84 919,552 1123,552 1372,303 1372,191.11 J2.19
COL13: J2.20 U1.34 | length 784
  Top Copper w10: U1.34 904.9,630.9 912,638 1067,638 1392.01,312.99 J2.20
GND: C1.1 C2.1 C3.1 C4.1 C5.1 C6.1 C7.1 C8.1 C9.1 C10.1 C11.1 C12.1 C13.1 C14.1 CR1.2 J1.A1/B12 J1.B1/A12 J1.S1 J1.S2 J1.S3 J1.S4 P1.1 R1.1 R7.1 SW1.1 SW1.2 U1.8 U1.23 U1.35 U1.47 U1.49 U2.1 U3.2 U4.2 U5.3 U5.10 Y1.2 | length 180
  Top Copper w10: U1.47 641.42,650.58 v2(643.39,648.61) ; v2(816.61,475.39) 818.58,473.42 U1.23 ; v2(816.61,648.61) 818.58,650.58 U1.35 ; CR1.2 v1(1171,733)
  other v1: 998,572 1261,711
  other v2: 643.39,475.39 686.69,475.39 730,475.39 773.31,475.39 643.39,518.69 686.69,518.69 730,518.69 773.31,518.69 816.61,518.69 643.39,562 686.69,562 730,562 773.31,562 816.61,562 643.39,605.31 686.69,605.31 730,605.31 773.31,605.31 816.61,605.31 686.69,648.61 730,648.61 773.31,648.61
HSE: U1.5 Y1.3 | length 81.4
  Top Copper w10: Y1.3 516.54,602.28 527.29,591.53 U1.5
NetC1_2: C1.2 U1.22 | length 74.6
  Top Copper w10: C1.2 786.97,356.53 798.9,368.46 U1.22
NetC3_2: C3.2 F1.1 U3.1 U3.3 | length 370.6
  Top Copper w10: v1(269,813) 299.89,813 U3.3 ; U3.1 378.11,813 v1(412,813)
  Top Copper w20: U3.1 C3.2@376.4,884.78 ; F1.1@438.88,881 380.18,881 C3.2@376.4,884.78 ; C3.2@376.4,884.78 C3.2 C3.2@376.4,884.78
  Bottom Copper w10: v1(269,813) v1(412,813)
NetR1_2: R1.2 R2.2 R6.2 U4.5 | length 166.4
  Top Copper w10: R2.2 R6.2 R1.2 1458.54,728 U4.5
NetR5_2: R5.2 SW1.3 SW1.4 | length 302.8
  Top Copper w10: SW1.3 557.02,94.17 570.72,80.46 R5.2
NRST: C2.2 R4.1 R5.1 U1.7 | length 622
  Top Copper w10: v1(548,551) 549.16,552.16 U1.7 ; v1(570,138) 570.23,137.77 611.77,137.77 R5.1 ; C2.2@617,193.47 612,188.47 R5.1 ; R4.1 R5.1
  Signal Layer 2 w10: v1(548,551) 548,160 v1(570,138)
OTGFS_N: CR1.1 J1.A7 J1.B7 U1.32 | length 606.3
  Top Copper w5.46: U1.32 883.34,591.53 887.95,596.14 917.17,596.14 917.44,596.41 926.67,596.41 932.8,590.28 v1(936,590.28) ; J1.A7 J1.A7@1180.16,795.94 ; v1(1182.36,669) 1182.36,672.2 1176.23,678.33 1176.23,686.05 1177.95,687.77 1182.86,687.77 1196.59,701.5 CR1.1 1195.77,709.82 1195.77,731.69 1175.54,751.91 1175.54,791.33 J1.A7@1180.16,795.94 ; J1.B7 1216.35,809.5 1216.35,791.13 1208.54,783.31 1191.15,783.31 1187.21,787.25 1187.21,788.89 J1.A7@1180.16,795.94
  Signal Layer 2 w4.2: v1(936,590.28) 938.46,590.28 945.22,597.04 1141.04,597.04 1175.6,631.6 1175.6,659.78 1182.36,666.54 v1(1182.36,669)
OTGFS_P: CR1.3 J1.A6 J1.B6 U1.33 | length 607.3
  Top Copper w5.46: U1.33 883.34,611.21 887.95,606.6 912.84,606.6 913.11,606.87 926.67,606.87 932.8,613 v1(936,613) ; v1(1159.64,669) 1159.64,672.2 1165.77,678.33 1165.77,686.05 1164.05,687.77 1159.14,687.77 1145.41,701.5 1145.41,732.24 1165.09,751.91 1165.09,791.33 1160.47,795.94 J1.B6 1160.47,829.41 1167.52,836.46 1167.52,838.1 1171.46,842.04 1188.85,842.04 1196.67,834.23 1196.67,815.85 J1.A6
  Signal Layer 2 w4.2: v1(936,613) 938.46,613 945.22,606.24 1137.23,606.24 1166.4,635.41 1166.4,659.78 1159.64,666.54 v1(1159.64,669)
OUT1: R2.1 U5.7 | length 58.8
  Top Copper w8: U5.7 1386.25,636.13 1398.46,623.92 R2.1
OUT2: R6.1 U5.8 | length 60.1
  Top Copper w8: U5.8 1383.25,651.87 1398.46,667.08 R6.1
RGB: J2.6 U1.14 | length 660.2
  Top Copper w10: v1(641,385) 641.42,385.42 U1.14 ; J2.6 1116.71,191.08 1116.71,271.71 v1(1117,272)
  Signal Layer 2 w10: v1(641,385) 661,405 984,405 v1(1117,272)
ROW0: J2.1 U1.19 | length 448.8
  Top Copper w10: U1.19 739.92,424.13 739.92,355.08 v1(740,355) ; v1(1017,249) 1017.5,248.5 1017.5,191.28 J2.1
  Signal Layer 2 w10: v1(740,355) 911,355 v1(1017,249)
ROW1: J2.2 U1.18 | length 486
  Top Copper w10: v1(720,385) 720.16,385.16 U1.18 ; J2.2 1037.84,190.95 1037.84,272.84 v1(1038,273)
  Signal Layer 1 w10: v1(720,385) 748,385 860,273 v1(1038,273)
ROW2: J2.3 U1.17 | length 546.7
  Top Copper w10: U1.17 700.55,424.13 700.55,355.45 v1(701,355) ; v1(1057,249) 1057.18,248.82 1057.18,190.97 J2.3
  Signal Layer 1 w10: v1(701,355) 726,330 769,330 848,251 979,251 1004,226 1034,226 v1(1057,249)
ROW3: J2.4 U1.16 | length 579.5
  Top Copper w10: U1.16 680.79,385.21 v1(681,385) ; J2.4 v1(1077,273)
  Signal Layer 1 w10: v1(681,385) 699.86,403.86 765.14,403.86 871,298 1052,298 v1(1077,273)
ROW4: J2.5 U1.15 | length 630.2
  Top Copper w10: U1.15 661.18,424.13 661.18,355.82 v1(662,355) ; J2.5 1096.87,190.92 1096.87,247.87 v1(1097,248)
  Signal Layer 2 w10: v1(662,355) 696,321 897,321 999,219 1068,219 v1(1097,248)
VBUS: C13.2 C14.2 CR1.5 F1.2 J1.A4/B9 J1.B4/A9 U4.1 U4.3 U5.4 U5.12 | length 2131.9
  Top Copper w8: v1(1170,584) 1170.5,584.5 1170.5,626.5 CR1.5 ; v1(1285,758) 1285,704 1302.38,686.62 U5.12 ; C14.2 1318.13,569.13 v1(1318.13,592.29) U5.4
  Top Copper w10: U4.3 1620,766.15 v1(1620,800.74)
  Top Copper w20: F1.2@438,946.43 F1.2 480.57,945.43 v1(482,944) ; v1(1094,758) 1095.51,759.51 J1.B4/A9 ; J1.A4/B9 1284.49,758.51 v1(1285,758) ; v1(1589,663) 1589,668.1 1611.5,690.6 1692,690.6 C13.2
  Bottom Copper w10: v1(1589,663) 1620,694 v1(1620,800.74)
  Bottom Copper w20: v1(482,944) 908,944 v1(1094,758) v1(1285,758) 1380,663 1388.83,663 ; v1(1170,584) 1309.83,584 v1(1318.13,592.29) 1388.83,663 ; v1(1589,663) 1388.83,663
VREF: C6.2 FL1.2 U1.9 | length 148.7
  Top Copper w10: FL1.2 507.53,448.59 C6.2 509.32,512.79 U1.9
pads on no net: CR1.4 CR1.6 J1. J1.A8 J1.B8 J2.MP1 J2.MP2 P1.MP1 P1.MP2 U1.2 U1.3 U1.4 U1.6 U1.10 U1.11 U1.20 U1.21 U1.30 U1.37 U1.43 U1.45 U1.46 U3.4 U4.4 U5.5 U5.6 U5.9 U5.11 Y1.1

## Polygon pours and split planes (outlines as drawn)
GND on Signal Layer 1 "NONET_L-01_P-001" (solid, remove dead copper, pour order 0): 0,0 0,1050 1760,1050 1760,0
GND on Signal Layer 2 "NONET_L-01_P-001" (solid, remove dead copper, pour order 2): 0,0 0,1050 1760,1050 1760,0
GND on Bottom Copper "NONET_L-01_P-001" (solid, remove dead copper, pour order 3): 0,0 0,1050 1760,1050 1760,0
GND on Top Copper "NONET_L-01_P-001" (solid, remove dead copper, pour order 1): 0,0 0,1050 1760,1050 1760,0

## Silkscreen, mask and mechanical layers (free items; w line width, h text height)
Top Overlay:
  text "REV: 0.0.4" at 40,1007 h32 r270
  text "MJM 2022" at 102,1007 h32 r270
  text "Heliotrope" at 936,287.99 h60
outline:
  the board outline again, w10

## Text inside footprints (layer, text, board x,y; h text height)
J2: Top Overlay "1" at 984.53,192.76 h32; Top Overlay "20" at 1413.66,192.76 h32